# Altium PCB PCB_Ecoder_Optic_Sensor_TH (R1).PcbDoc
Units mm, origin at the board's own origin, x right, y up, seen from the top; angles counter-clockwise.
Board outline 20.6 x 25 mm, 2 copper layers (Top Layer, Bottom Layer), stack 1.571 mm thick; 33 components, 15 nets, 85 pads, 38 vias.
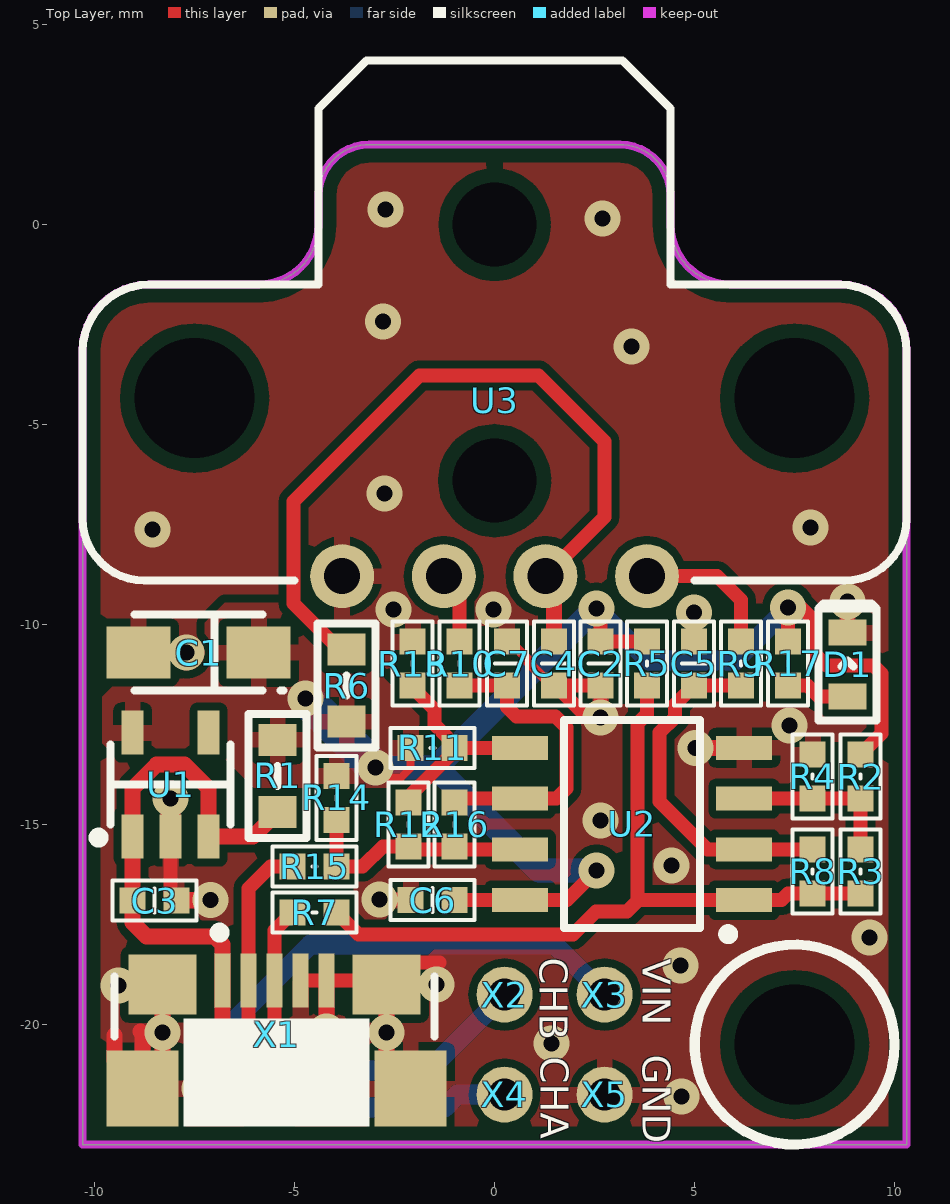
[diagram p0: Top Layer view]
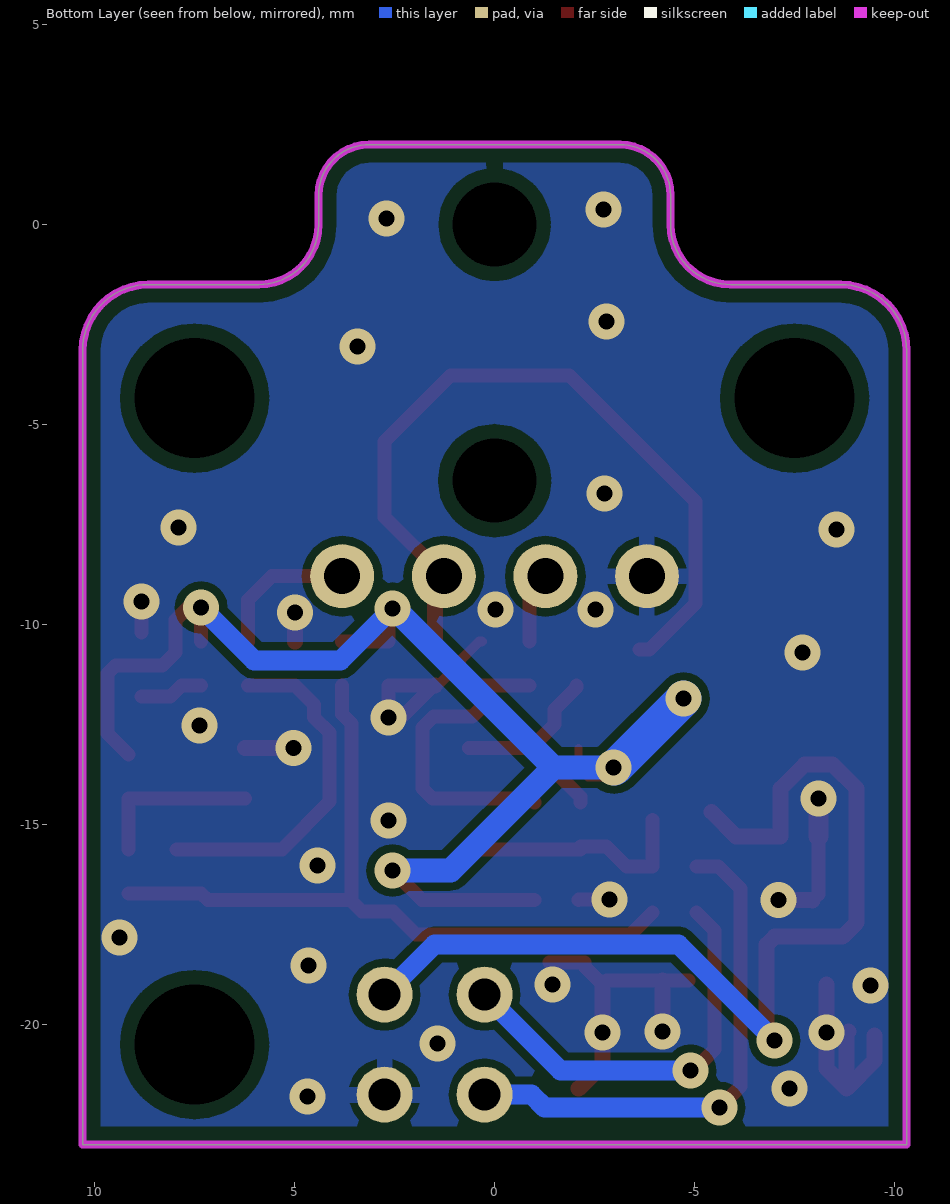
[diagram p1: Bottom Layer view, seen from below]
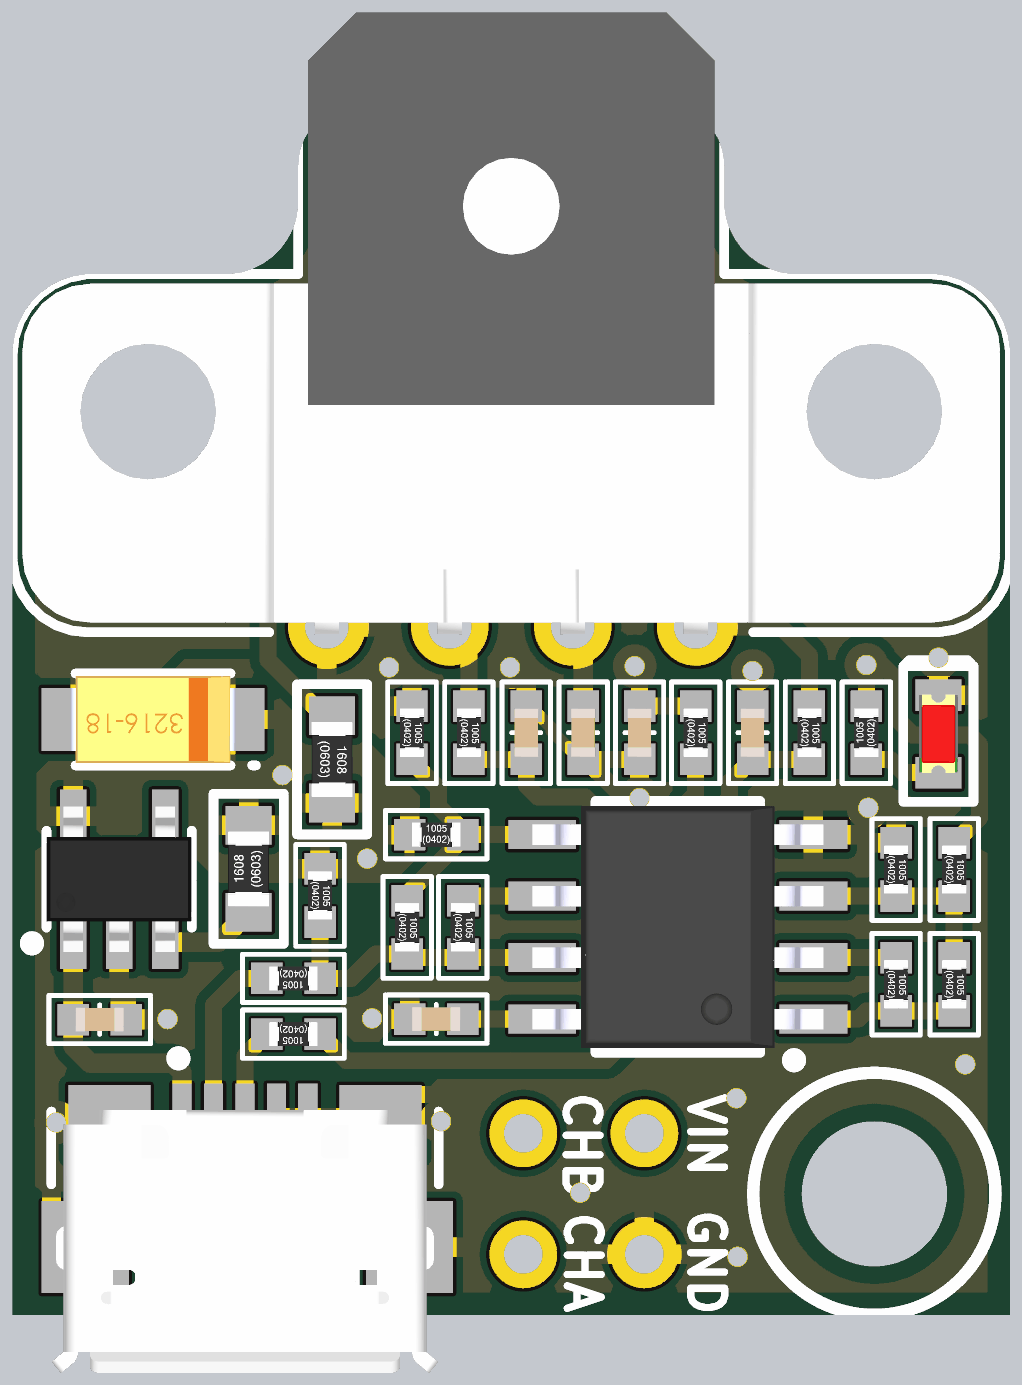
[diagram p2: 3D render of the assembled board from above, using the file's embedded part models]

## Layer stack, top to bottom
Top Solder: solder mask 0.0102, Solder Resist, Dk 3.5
Top Layer: signal copper 0.0356
Dielectric 1: dielectric 1.5, FR-4, Dk 4.8
Bottom Layer: signal copper 0.0356
Bottom Solder: solder mask 0.0102, Solder Resist, Dk 3.5

## Board outline
-10.3,-23 -10.3,-3.148 cw(c-8.652,-3.148) -8.652,-1.5 -5.9,-1.5 ccw(c-5.9,0) -4.4,0 -4.4,0.73 cw(c-3.13,0.73) -3.13,2 3.13,2 cw(c3.13,0.73) 4.4,0.73 4.4,0 ccw(c5.9,0) 5.9,-1.5 8.652,-1.5 cw(c8.652,-3.148) 10.3,-3.148 10.3,-23

## Design rules (kind name [scope] priority, off if disabled: settings)
Clearance Clearance_KeepOut_Oll [OnLayer('Keep-Out Layer') vs OnLayer('Top Layer') Or OnLayer('Bottom Layer')] p1: gap=0.35 ignorepadtopadclearanceinfootprint=FALSE except(0: Arc-Hole Track-Hole SMDPad-Hole THPad-Hole Via-Hole Fill-Hole Poly-Hole Region-Hole Text-Hole)
Clearance Clearance_Hole_All [IsPad and (PadIsPlated <> 'True')] p2: gap=0.35 ignorepadtopadclearanceinfootprint=FALSE except(0: Arc-Hole Track-Hole SMDPad-Hole THPad-Hole Via-Hole Fill-Hole Poly-Hole Region-Hole Text-Hole)
Clearance Clearance_AllPoligon_All [InPoly] p3: gap=0.2 ignorepadtopadclearanceinfootprint=FALSE except(0: Arc-Hole Track-Hole SMDPad-Hole THPad-Hole Via-Hole Fill-Hole Poly-Hole Region-Hole Text-Hole)
Clearance [All] p4: gap=0.2 ignorepadtopadclearanceinfootprint=FALSE except(0: Arc-Hole Track-Hole SMDPad-Hole THPad-Hole Via-Hole Fill-Hole Poly-Hole Region-Hole Text-Hole)
ComponentClearance [All] p1: gap=0 collisioncheckmode=3 verticalgap=0 showdistances=FALSE
HoleSize [All] p1: absolutevalues=TRUE maxlimit=6 minlimit=0.2 maxpercent=80.000 minpercent=20.000
HoleToHoleClearance [All] p1: gap=0.25 allowstackedmicrovias=TRUE
MinimumSolderMaskSliver [All] p1: minsoldermaskwidth=0.06
MinimumSolderMaskSliver SilkscreenOverComponentPads [All] p2: minsoldermaskwidth=0.254
PlaneConnect [All] p1: planeconnectstyle=Relief reliefexpansion=0.1 reliefentries=4 reliefconductorwidth=0.4 reliefairgap=0.2
PolygonConnect PolygonConnect_isVia [IsVia] p1: connectstyle=Direct reliefconductorwidth=0.254 reliefentries=4 polygonreliefangle="90 Angle" airgapwidth=0.254
PolygonConnect [All] p2: connectstyle=Relief reliefconductorwidth=0.4 reliefentries=4 polygonreliefangle="90 Angle" airgapwidth=0.2
RoutingCorners [All] p1: cornerstyle=45-Degree minsetback=0.5 maxsetback=5
RoutingVias [All] p1: holewidth=0.6 width=0.9 viastyle="Through Hole" minholewidth=0.2 minwidth=0.6 maxholewidth=5 maxwidth=8
ShortCircuit [InNet('GND') vs InNet('NetC13_2')] p1: allowed=TRUE
ShortCircuit ShortCircuit_1 [All] p2: allowed=FALSE
SilkToSilkClearance [All] p1: silktosilkclearance=0.102
SilkToSolderMaskClearance [IsPad] p1: minsilkscreentomaskgap=0.102 clearancetoexposedcopper=TRUE
SolderMaskExpansion [All] p1: expansion=0.07
Width [All] p1: maxlimit=2 minlimit=0.18 preferedwidth=0.4
21 further rules are at their usual default settings.

## Components (designator, comment, footprint, x,y, rotation, side; value= is the part's Value field where it differs from the comment)
C1 "TCAP CASE A" "TCAP SMA" -7.4,-10.7 r180 top value=22uF
C2 "Ceramic Capacitor X7R 10% 50V" CAP_0402 2.65,-10.975 r90 top value=100nF
C3 "Ceramic Capacitor X7R 10% 50V" CAP_0402 -8.5,-16.9 r180 top value=100nF
C4 "Ceramic Capacitor X7R 10% 50V" CAP_0402 1.485,-10.975 r90 top value=100nF
C5 "Ceramic Capacitor X7R 10% 50V" CAP_0402 4.985,-10.975 r270 top value=10pF
C6 "Ceramic Capacitor X7R 10% 50V" CAP_0402 -1.55,-16.89 r0 top value=100nF
C7 "Ceramic Capacitor X7R 10% 50V" CAP_0402 0.31,-10.975 r270 top value=10pF
D1 "LED 0603" "LED 0603_RED" 8.825,-11 r90 top value=RED
R1 "Thick Film Resistor 0603 5%" RES_0603 -5.425,-13.785 r90 top value=DNP
R2 "Thick Film Resistor 0402 5%" RES_0402 9.15,-13.8 r270 top value=3.3k
R3 "Thick Film Resistor 0402 5%" RES_0402 9.15,-16.17 r270 top value=22k
R4 "Thick Film Resistor 0402 5%" RES_0402 7.95,-13.8 r270 top value=1.2k
R5 "Thick Film Resistor 0402 5%" RES_0402 3.81,-10.975 r270 top value=1k
R6 "Thick Film Resistor 0603 5%" RES_0603 -3.7,-11.525 r270 top value=180R
R7 "Thick Film Resistor 0402 5%" RES_0402 -4.5,-17.2 r180 top value=50R
R8 "Thick Film Resistor 0402 5%" RES_0402 7.95,-16.17 r270 top value=DNP
R9 "Thick Film Resistor 0402 5%" RES_0402 6.16,-10.975 r270 top value=180R
R10 "Thick Film Resistor 0402 5%" RES_0402 -0.875,-10.975 r270 top value=180R
R11 "Thick Film Resistor 0402 5%" RES_0402 -1.55,-13.08 r0 top value=3.3k
R12 "Thick Film Resistor 0402 5%" RES_0402 -2.15,-14.995 r270 top value=22k
R13 "Thick Film Resistor 0402 5%" RES_0402 -2.05,-10.975 r270 top value=1.2k
R14 "Thick Film Resistor 0402 5%" RES_0402 -3.95,-14.335 r270 top value=1k
R15 "Thick Film Resistor 0402 5%" RES_0402 -4.5,-16.05 r180 top value=50R
R16 "Thick Film Resistor 0402 5%" RES_0402 -1,-14.995 r270 top value=DNP
R17 "Thick Film Resistor 0402 5%" RES_0402 7.335,-10.975 r90 top value=1.2k
U1 "TLV70233" SOT-23-5 -8.1,-14 r90 top
U2 "LM2903" SOIC-8-150 3.441,-14.985 r180 top
U3 "Q9845" SENSOR_OPTO-ENCODER 0,0 r180 top locked
X1 "ZX62-AB-5PA(11)" USB_MICRO -5.5,-23.7 r180 top locked
X2 "PAD_C_1.2MM" PAD_C_1.2mm 0.25,-19.25 r0 top
X3 "PAD_C_1.2MM" PAD_C_1.2mm 2.75,-19.25 r0 top
X4 "PAD_C_1.2MM" PAD_C_1.2mm 0.25,-21.75 r0 top
X5 "PAD_C_1.2MM" PAD_C_1.2mm 2.75,-21.75 r0 top

## Footprints (in the part's own frame and the unit in brackets; to place one, negate y for a bottom-side part, rotate by r counter-clockwise, add the part's x,y. Pads: shape width x height; smd on the part's side, far side on the other; paste and mask are expansions set on the pad)
CAP_0402 [mm]
  rect 0.65x0.65 smd mask+0.05: 1(-0.55,0) 2(0.55,0)
  silkscreen extent -1.05,-0.5 1.05,0.5, body extent -0.5,-0.25 0.5,0.25, height 0.51
"LED 0603_RED" [mm]
  rect 0.65x0.95 smd: 1(-0.8,0) 2(0.8,0)
  silkscreen extent -1.4,-0.72 1.53,0.72, body extent -0.81,-0.4 0.81,0.4, height 0.6
PAD_C_1.2mm [mm]
  round 1.4 hole 0.8: 1(0,0)
RES_0402 [mm]
  rect 0.65x0.65 smd mask+0.05: 1(-0.55,0) 2(0.55,0)
  silkscreen extent -1.05,-0.5 1.05,0.5, body extent -0.5,-0.25 0.5,0.25, height 0.35
RES_0603 [mm]
  rect 0.8x0.95 smd: 1(-0.9,0) 2(0.9,0)
  silkscreen extent -1.55,-0.72 1.55,0.72, body extent -0.77,-0.42 0.78,0.43, height 0.45
SENSOR_OPTO-ENCODER [mm] "HEDS-97** Option 51"
  round 0 hole 3 unplated: 0(-7.5,4.34) 0(7.5,4.34)
  round 0 hole 2.1 unplated: 0(0,6.4) 0(0,0)
  round 1.6 hole 0.9: 1(3.81,8.79) 2(1.27,8.79) 3(-1.27,8.79) 4(-3.81,8.79)
  silkscreen extent -10.3,-4.1 10.3,8.9, body extent -10.1,-3.9 10.1,8.95, height 10.81
SOIC-8-150 [mm]
  rect 1.4x0.6 smd: 1(-2.8,1.905) 2(-2.8,0.635) 3(-2.8,-0.635) 4(-2.8,-1.905) 5(2.8,-1.905) 6(2.8,-0.635) 7(2.8,0.635) 8(2.8,1.905)
  silkscreen extent -2.53,-2.6 1.7,2.88, body extent -3.01,-2.5 3.01,2.5, height 1.75
SOT-23-5 [mm] "SOT23, 5-Leads, Body 3,0x2,6mm, Pitch 0,95mm"
  rect 1.1x0.55 smd: 1(-1.3,0.95) 2(-1.3,0) 3(-1.3,-0.95) 4(1.3,-0.95) 5(1.3,0.95)
  silkscreen extent -1.45,-1.5 1,1.92, body extent -1.5,-1.5 1.5,1.5, height 1.45
"TCAP SMA" [mm]
  rect 1.6x1.3 smd: +(-1.5,0) -(1.5,0)
  silkscreen extent -2.12,-0.95 1.6,0.95, body extent -1.7,-0.9 1.7,0.9, height 1.7
USB_MICRO [mm] "Connector; USB2.0, Type A, SM; 5 Position; Right Angle"
  rect 0.4x1.35 smd: 1(1.3,-4.8) 2(0.65,-4.8) 3(0,-4.8) 4(-0.65,-4.8) 5(-1.3,-4.8)
  rect 1.8x1.9 smd: SH(-3.4,-2.1) SH(3.3,-2.1)
  rect 1.7x1.5 smd: SH(-2.8,-4.7) SH(2.8,-4.7)
  silkscreen extent -4,-6.12 4,-3.4, body extent -3.99,-4.93 3.99,0.5, height 2.78

## Part data
C1: "Tantal Capacitor SMA", LatestRevisionDate=25.01.2012, PackageDescription="SMT case A"
C2 C3 C4 C5 C6 C7: library part "Cap CER 0402 S", "Multilayer ceramic capacitors  0402", Case=0402, Designer=Crom, LatestRevisionDate=19.05.14
D1: "Typical SMT LED", LatestRevisionDate=14.06.17
R1 R6: library part "Res 0603", "Chip Resistor 0603 (1608)", Case=0603, Designer=Crom, Latest Revision=19.05.14
R2 R3 R4 R5 R7 R8 R9 R10 R11 R12 R13 R14 R15 R16 R17: library part "Res 0402", "Chip Resistor 0402 (1005) 1/16W", Case=0402, Designer=Crom, LatestRevisionDate=19.05.14
U1: "LDO 3.3V 300mA"
U2: library part "LM293 / LM2903", "Dual Differential Comparators"
U3: library part Optic_Encoder_Sensor, "Small Optical Encoder Module (HEDS-97xx)"
X1: library part USB_micro, "USB micro AB SMT R/A", link=http://www.digikey.com/product-detail/en/ZX62-AB-5PA%2811%29/H11635CT-ND/1993370
X2 X3 X4 X5: library part PAD_1.2MM, "1x1x0.8mm hole"

## Free pads (board coordinates)
  round 1.524 hole 3 unplated: 0(7.5,-20.5)

## Via types
v1: diameter 0.9, hole 0.4, Top Layer to Bottom Layer, tented both sides, 38 vias

## Nets (pads, with @x,y where several pads share a name; then routed paths per layer and width w, separated by ;. In a path a pad name is that pad's centre, name@x,y a point inside that pad or via, vN(x,y) a via of type N, cw(c..) or ccw(c..) an arc to the next point about the centre after c; other vN are vias at no path point)
GND: C1.- C2.1 C3.1 C4.1 C5.1 C6.1 C7.1 D1.2 R4.1 R13.1 U1.2 U2.4 U3.1 X1.4 X1.5 X1.SH X5.1 | length 25.6
  Top Layer w0.25: C7.1 0.385,-10.425 0.835,-10.875 0.835,-10.94 1.42,-11.525 C4.1
  Top Layer w0.35: C3.1@-8.1,-16.75 U1.2 ; X1.4 X1.5 -2.8,-18.9 -2.7,-19 -2.252,-18.552 -2.252,-18.45 -1.377,-18.45 ; v1(-2.875,-16.875) -2.115,-16.875 C6.1 ; C4.1 C4.1@1.528,-11.525 ; D1.2 v1(8.825,-9.425) ; C4.1@1.528,-11.525 2.328,-12.325 v1(2.65,-12.325) C2.1 C4.1@1.528,-11.525
  Top Layer w0.4: -9.496,-20.275 -9.496,-20.904 X1.SH@-8.8,-21.6 ; -8.85,-20.171 -8.8,-20.221 X1.SH@-8.8,-21.6 ; X1.SH@-8.3,-19 v1(-8.3,-20.2) -8.3,-21.1 X1.SH@-8.8,-21.6 ; C3.1 -7.94,-16.89 v1(-7.1,-16.89) ; v1(-4.2,-20.175) X1.5 ; X1.SH@-2.7,-19 v1(-2.7,-20.2) -2.7,-21 X1.SH@-2.1,-21.6 ; C5.1 v1(4.985,-9.7) ; v1(5.025,-13.08) U2.4
  Top Layer w0.5: U1.2 v1(-8.1,-14.35)
  other v1: 4.675,-21.8 -7.375,-21.6 1.425,-20.475 -9.4,-19.025 -1.45,-19 4.65,-18.525 9.378,-17.825 4.425,-16.025 2.65,-14.9 7.375,-12.525 -7.7,-10.7 -2.525,-9.625 -0.025,-9.625 -8.55,-7.625 7.9,-7.575 -2.75,-6.725 3.425,-3.05 -2.795,-2.425 2.7,0.15 -2.725,0.375
NetC4_2: C4.2 R6.1 U3.3 | length 19.9
  Top Layer w0.35: R6.1@-3.625,-10.625 -3.875,-10.625 -5.025,-9.475 -5.025,-6.925 -1.875,-3.775 1.1,-3.775 2.75,-5.425 2.75,-7.31 U3.3 U3.3@1.46,-8.98
  Top Layer w0.4: U3.3@1.46,-8.98 1.485,-9.005 C4.2
NetD1_1: D1.1 R17.1 | length 1.6
  Top Layer w0.35: R17.1 7.825,-11.525 8.1,-11.8 D1.1
NetR2_2: R2.2 R3.1 R4.2 U2.3 | length 4.2
  Top Layer w0.35: U2.3 R4.2 R2.2 R3.1
NetR3_2: R3.2 R5.2 R7.1 R8.2 U2.1 | length 19.2
  Top Layer w0.35: R7.1 -3.4,-17.75 1.96,-17.75 2.535,-17.175 3.315,-17.175 3.575,-16.915 3.575,-12.475 3.81,-12.24 R5.2 ; 3.6,-16.89 U2.1 7.17,-16.89 7.34,-16.72 R8.2 R3.2
NetR9_1: R9.1 U3.4 | length 3.6
  Top Layer w0.35: U3.4 5.565,-8.79 6.16,-9.385 R9.1
NetR10_1: R10.1 U3.2 | length 1.8
  Top Layer w0.35: U3.2 -0.875,-9.185 R10.1
NetR11_2: R11.2 R12.1 R13.2 U2.5 | length 5.5
  Top Layer w0.35: R12.1 -2.15,-14.31 -1,-13.16 R11.2 ; R13.2 -2.05,-11.575 -1.5,-12.125 -1.5,-12.5 -1,-13 R11.2 ; U2.5 R11.2
NetR12_2: R12.2 R14.2 R15.1 R16.2 U2.7 | length 6
  Top Layer w0.35: R14.2 R15.1 -3.3,-16.05 -2.795,-15.545 R12.2 ; R12.2@-2.15,-15.62 U2.7
OUT_CHA: R15.2 X1.2 X4.1 | length 13
  Top Layer w0.35: v1(-5.625,-22.076) -6.15,-21.551 X1.2 -6.15,-16.6 -5.6,-16.05 R15.2
  Bottom Layer w0.5: v1(-5.625,-22.076) -1.251,-22.076 -0.925,-21.75 X4.1
OUT_CHB: R7.2 X1.3 X2.1 | length 10.4
  Top Layer w0.35: R7.2 -5.5,-17.65 X1.3 -5.5,-20.625 -4.975,-21.15 v1(-4.9,-21.15)
  Bottom Layer w0.5: v1(-4.9,-21.15) -1.65,-21.15 X2.1
SENSOR_CHA: C7.2 R10.2 R16.1 U2.6 | length 7.9
  Top Layer w0.35: R16.1 -0.905,-14.35 U2.6 1.55,-14.35 1.8,-14.1 1.8,-12.575 1.525,-12.3 0.55,-12.3 0.31,-12.06 C7.2 R10.2
SENSOR_CHB: C5.2 R8.1 R9.2 U2.2 | length 8.8
  Top Layer w0.35: R9.2 C5.2 4.51,-12 4.51,-12.318 4.125,-12.703 4.125,-14.425 5.32,-15.62 U2.2 R8.1
VCC: C1.+ C2.2 C6.2 R1.2 R2.1 R5.1 R6.2 R11.1 R14.1 R17.2 U1.5 U2.8 | length 34.7
  Top Layer w0.2: v1(-2.975,-13.575) -2.73,-13.82 -2.331,-13.82 -2.1,-13.589 R11.1
  Top Layer w0.35: C6.2 U2.8 1.812,-16.89 v1(2.552,-16.15) ; v1(2.55,-9.6) 2.65,-9.7 C2.2 R5.1 ; R17.2 v1(7.335,-9.575) 7.663,-9.575 7.975,-9.887 7.975,-10.7 8.3,-11.025 9.475,-11.025 9.675,-11.225 9.675,-12.725 R2.1
  Bottom Layer w0.5: v1(2.55,-9.6) 3.85,-10.9 6.01,-10.9 v1(7.335,-9.575)
  Bottom Layer w0.6: v1@-3,-13.575 v1(-2.975,-13.575) -1.47,-13.575 ; v1(2.55,-9.6) 2.505,-9.6 -1.47,-13.575 ; v1(2.552,-16.15) 1.105,-16.15 -1.47,-13.575
  Bottom Layer w0.9: v1(-4.725,-11.85) v1@-3,-13.575
VIN: C3.2 R1.1 U1.1 U1.3 X1.1 X3.1 | length 25.2
  Top Layer w0.4: v1(-7,-20.4) -6.8,-20.2 X1.1 -6.8,-18 -7,-17.8 -8.7,-17.8 -9.05,-17.45 C3.2 U1.1 -9.05,-14.098 -8.452,-13.5 -7.748,-13.5 -7.15,-14.098 U1.3 -6.04,-15.3 R1.1
  Bottom Layer w0.5: v1(-7,-20.4) -4.6,-18 1.5,-18 X3.1
pads on no net: U1.4 U3.0

## Polygon pours and split planes (outlines as drawn)
VCC on Top Layer "Signal Layer 4-No Net" (solid, pour order 0): -6.825,-13.275 -9.5,-13.275 -9.805,-12.97 -9.805,-11.805 -9.425,-11.425 -8.14,-11.425 -7.25,-10.535 -7.25,-9.95 -6.75,-9.45 -5.025,-9.45 -3.75,-10.725 -3.375,-10.725 -2.325,-11.775 -1.85,-11.775 -1.5,-12.125 -1.5,-14.075 -6.025,-14.075
GND on Top Layer "Signal Layer 4-No Net" (solid, remove dead copper, pour order 2): -10.275,-22.95 -10.25,-22.925 10.25,-22.925 10.25,-2.525 9.225,-1.5 5.25,-1.5 4.4,-0.65 4.4,0.8 4.375,0.825 4.375,1.25 3.625,2 -3.625,2 -4.4,1.225 -4.4,-0.57 -5.305,-1.475 -9.3,-1.475 -10.3,-2.475 -10.3,-3.9
GND on Bottom Layer "Signal Layer 4-No Net" (solid, remove dead copper, pour order 4): -10.175,-22.975 -10.15,-22.95 10.35,-22.95 10.35,-2.55 9.325,-1.525 5.35,-1.525 4.5,-0.675 4.5,0.775 4.475,0.8 4.475,1.225 3.725,1.975 -3.525,1.975 -4.3,1.2 -4.3,-0.595 -5.205,-1.5 -9.2,-1.5 -10.2,-2.5 -10.2,-3.925

## Keep-outs
Keep-Out Layer:
  lines w0.2: -10.3,-23 -10.3,-3.148 cw(c-8.652,-3.148) -8.652,-1.5 -5.9,-1.5 ccw(c-5.9,0) -4.4,0 -4.4,0.73 cw(c-3.13,0.73) -3.13,2 -2.552,2 0,2 2.552,2 3.13,2 cw(c3.13,0.73) 4.4,0.73 4.4,0 ccw(c5.9,0) 5.9,-1.5 8.652,-1.5 cw(c8.652,-3.148) 10.3,-3.148 10.3,-23 -10.3,-23

## Silkscreen, mask and mechanical layers (free items; w line width, h text height)
Top Overlay:
  circle w0.254: c7.5,-20.5 r2.5
  rectangle: -7.775,-22.55 -3.13,-19.85
  text "CHB" at 1.125,-18.325 h0.7 r270
  text "VIN" at 3.7,-18.35 h0.7 r270
  text "GND" at 3.7,-20.75 h0.7 r270
  text "CHA" at 1.15,-20.8 h0.7 r270